# EAGLE board ir_module (EAGLE 6.1)
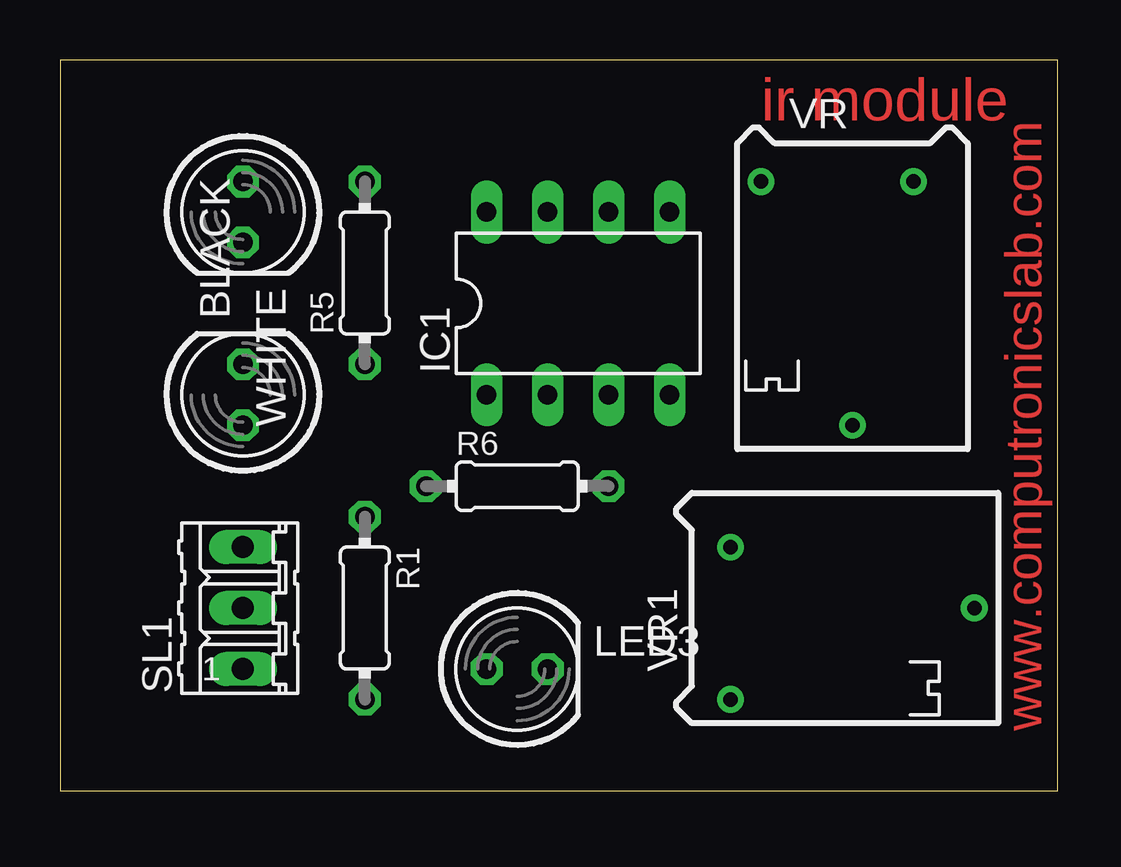
[diagram p0: board, top side]
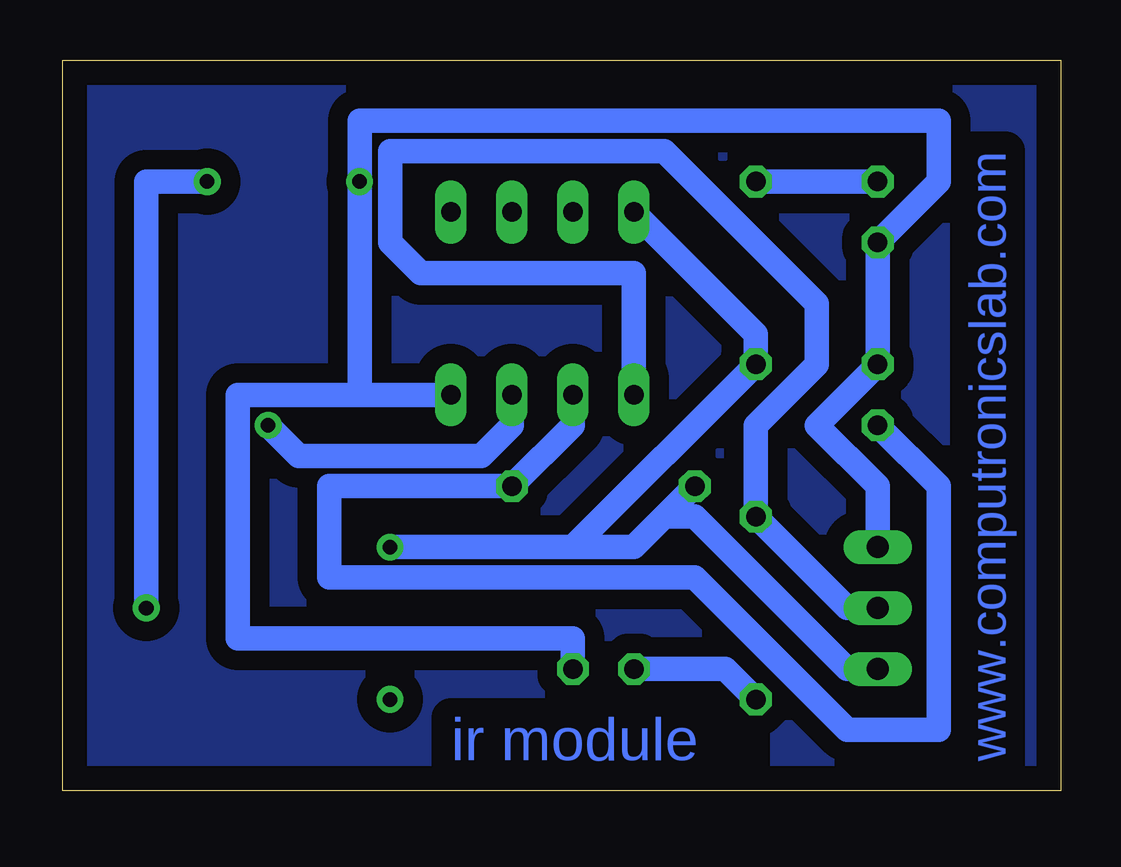
[diagram p1: board, bottom side, seen from below]

Size 41.58 x 30.47 mm. Coordinates in mm from the lower left corner, seen from the top.
Outline: 0,0 41.58,0 41.58,30.47 0,30.47 0,0
Copper layers (1*16): Top 0.035mm / dielectric 1.5mm / Bottom 0.035mm
Design rules: minimum track width 40mil, minimum drill 24mil, track to track 8mil, track to pad 8mil, pad to pad 8mil, via to via 8mil, smd to smd 8mil, copper to edge 40mil, drill to drill 8mil, minimum pad ring 10mil, minimum via ring 8mil, stop-mask expansion 4mil, vias tented up to drill 0mil, thermal gap 10mil

## Footprints (pad centres in the part's own frame; a part is rotated, then mirrored left to right if it is on the bottom)
LED5MM = drill 0.813 octagon: A -1.27,0; K 1.27,0
DIL-08 = drill 0.813 long: 1 -3.81,-3.81; 2 -1.27,-3.81; 3 1.27,-3.81; 4 3.81,-3.81; 5 3.81,3.81; 6 1.27,3.81; 7 -1.27,3.81; 8 -3.81,3.81
0204/7 = drill 0.813 octagon: 1 -3.81,0; 2 3.81,0
03P = drill 0.914 long: 1 -2.54,0; 2 0,0; 3 2.54,0
RTRIM64P = drill 0.61: 1 -2.54,-3.81; 2 7.62,0; 3 -2.54,2.54

## Placement (x,y rotation side)
BLACK  5mm  [LED5MM]  7.62,16.51 90 top
IC1  358  [DIL-08]  21.59,20.32 0 top
LED3  5mm  [LED5MM]  19.05,5.08 0 top
R1  220E  [0204/7]  12.7,7.62 270 top
R5  220E  [0204/7]  12.7,21.59 90 top
R6  10K  [0204/7]  19.05,12.7 0 top
SL1  [03P]  7.62,7.62 90 top
VR  50k  [RTRIM64P]  33.02,22.86 270 top
VR1  100E  [RTRIM64P]  30.48,7.62 0 top
WHITE  5mm  [LED5MM]  7.62,24.13 270 top

## Library data of the parts
BLACK LED3 WHITE = led
IC1 = st-microelectronics; MF: Arrow Electronics; MPN: NE555N; OC_FARNELL: 1467742; OC_NEWARK: 89K1486
R1 R5 R6 = rcl
SL1 = con-amp-quick; OC_FARNELL: unknown; OC_NEWARK: unknown
VR VR1 = resistor

## Nets
N$2: IC1.8 R5.1 R6.1 SL1.1 VR1.3
N$3: IC1.1 R1.1 SL1.2
N$4: LED3.A R1.2
N$5: R5.2 WHITE.A
N$6: IC1.3 VR.2
N$9: BLACK.A IC1.2 R6.2
N$10: VR1.2 VR.3
N$11: BLACK.K IC1.4 LED3.K SL1.3 VR.1 WHITE.K

## Tracks (layer width: path | path; a pad name or v marks a point on that pad's centre or on a via)
N$1
  pour Bottom (isolate 0.813): 1.27,0 0,1.27 0,29.21 1.27,30.48 39.37,30.48 41.91,27.94 41.91,2.54 39.37,0
N$2
  Bottom 1.016: 20.32,10.16 17.78,10.16 16.51,11.43 | 20.32,10.16 VR1.3 | R6.1 16.51,11.43 | 20.32,10.16 R5.1 12.7,19.05 IC1.8 | SL1.1 8.89,5.08 15.24,11.43 16.51,11.43
N$3
  Bottom 1.016: SL1.2 8.89,7.62 R1.1 12.7,15.24 10.16,17.78 10.16,20.32 16.51,26.67 27.94,26.67 27.94,22.86 26.67,21.59 17.78,21.59 IC1.1
N$4
  Bottom 1.016: R1.2 13.97,5.08 LED3.A
N$5
  Bottom 1.016: R5.2 WHITE.A
N$6
  Bottom 1.016: VR.2 31.75,13.97 24.13,13.97 22.86,15.24 IC1.3
N$9
  Bottom 1.016: IC1.2 20.32,15.24 R6.2 29.21,12.7 30.48,12.7 30.48,8.89 15.24,8.89 8.89,2.54 5.08,2.54 5.08,12.7 BLACK.A
N$10
  Bottom 1.016: VR1.2 38.1,25.4 VR.3
N$11
  Bottom 1.016: SL1.3 7.62,12.7 10.16,15.24 BLACK.K WHITE.K 5.08,25.4 5.08,27.94 29.21,27.94 VR.1 29.21,16.51 | IC1.4 29.21,16.51 | LED3.K 20.32,6.35 30.48,6.35 34.29,6.35 34.29,7.62 34.29,11.43 34.29,16.51 29.21,16.51

## Text on the board
Top: ir module | www.computronicslab.com
Bottom: www.computronicslab.com | ir module